# Altium PCB FEV-60_Motor_Driver_OnePhase.PcbDoc
Units mil, origin at the board's own origin, x right, y up, seen from the top; angles counter-clockwise.
Board outline 6000 x 4000 mil, 2 copper layers (Top Layer, Bottom Layer); 10 components, 11 nets, 42 pads, 7 vias.
Unrouted connection lines stored in the file: 2.
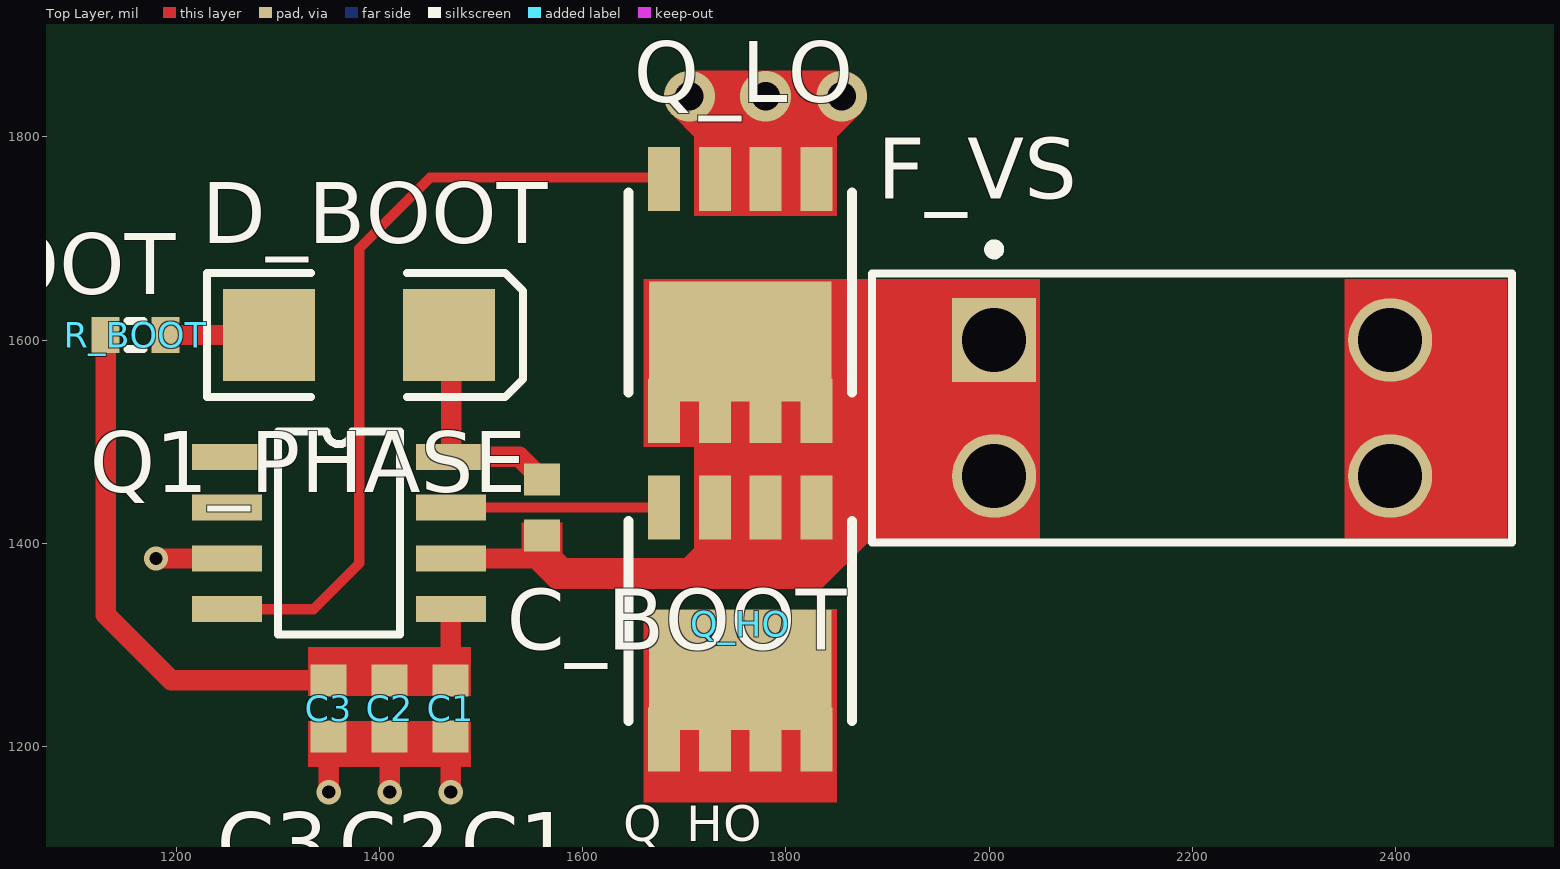
[diagram p0: Top Layer view]
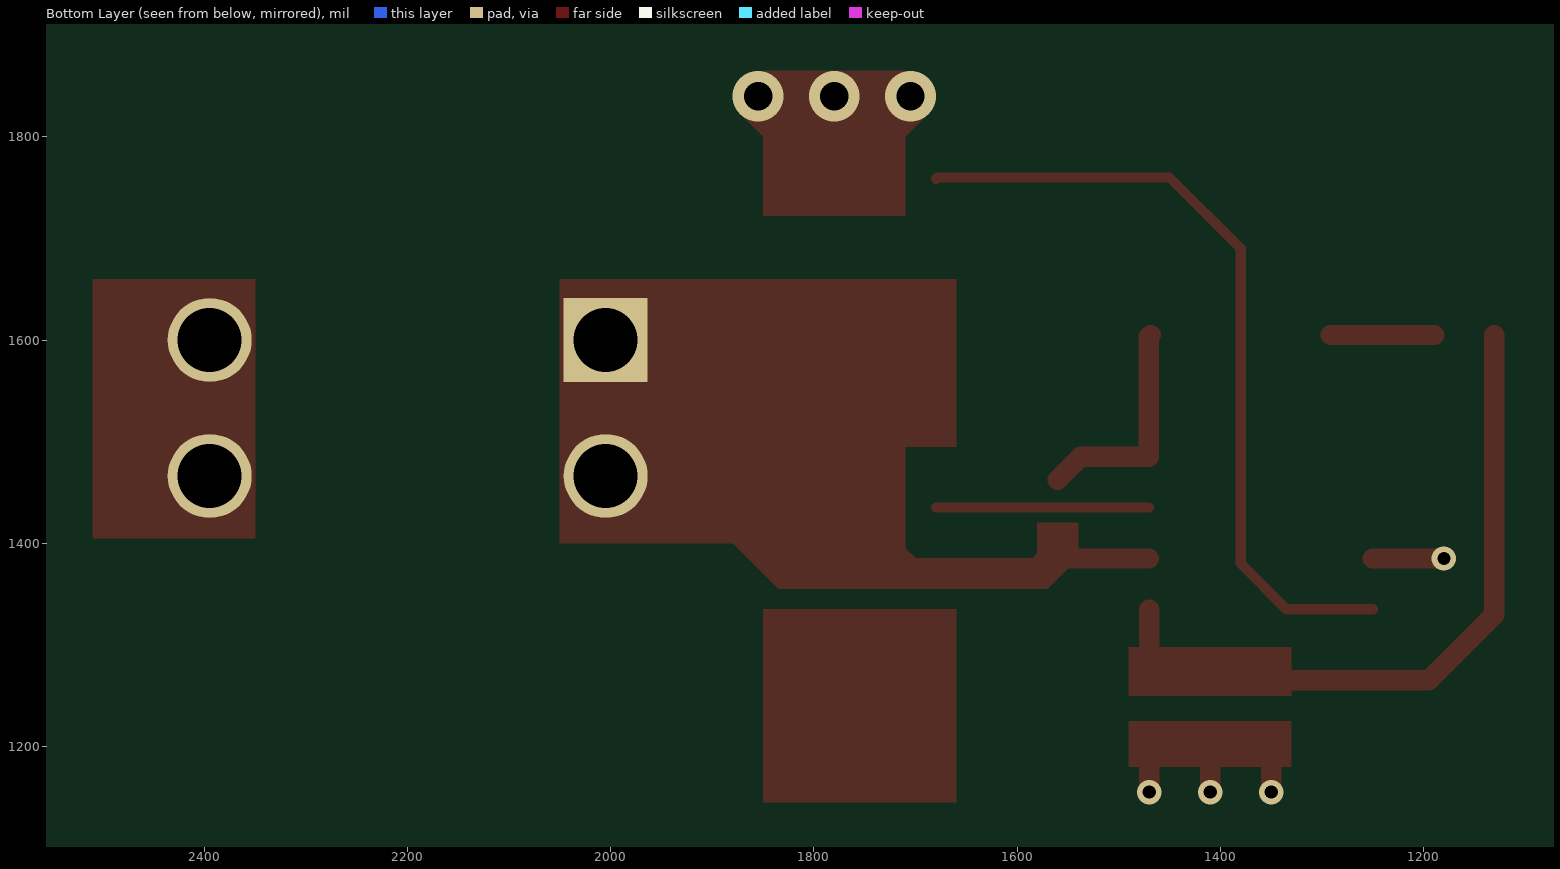
[diagram p1: Bottom Layer view, seen from below]

## Layer stack, top to bottom
Top Solder: solder mask 0.4, Solder Resist, Dk 3.5
Top Layer: signal copper 1.4
Dielectric 1: dielectric 12.6, FR-4, Dk 4.8
Bottom Layer: signal copper 1.4
Bottom Solder: solder mask 0.4, Solder Resist, Dk 3.5

## Board outline
1000,1000 7000,1000 7000,5000 1000,5000

## Design rules (kind name [scope] priority, off if disabled: settings)
Clearance [All] p1: gap=6 ignorepadtopadclearanceinfootprint=FALSE
PolygonConnect [All] p1: connectstyle=Relief reliefconductorwidth=10 reliefentries=4 polygonreliefangle="90 Angle" airgapwidth=10
RoutingVias [All] p1: holewidth=13 width=24 viastyle="Through Hole" minholewidth=13 minwidth=24 maxholewidth=28 maxwidth=50
SolderMaskExpansion [All] p1: expansion=4
Width [All] p1: maxlimit=40 minlimit=6 preferedwidth=6
30 further rules are at their usual default settings.

## Classes and differential pairs
component class FEV-60_Motor_Driver_OnePhase: C1 C2 C3 C_BOOT F_VS Q1_PHASE Q_HO Q_LO R_BOOT

## Components (designator, comment, footprint, x,y, rotation, side; value= is the part's Value field where it differs from the comment)
C1 "Cap Semi" 1608[0603] 1470,1237.44 r270 top value=10uF
C2 "Cap Semi" 1608[0603] 1410,1237.44 r270 top value=10uF
C3 "Cap Semi" 1608[0603] 1350,1237.44 r270 top value=10uF
C_BOOT "Cap Semi" 1608[0603] 1560,1435 r90 top value=270pF
D_BOOT "STPS2200U" SMB 1380,1605 r0 top
F_VS "3568" KSTN-3568_V 2199.88,1533.07 r0 top
Q1_PHASE "FAN7191-F085" SOIC8 1250,1485 r0 top
Q_HO "TPH2900ENH" TPH2900ENH 1830,1435 r270 top
Q_LO "TPH2900ENH" TPH2900ENH 1830,1758.35 r270 top
R_BOOT "Res3" J1-0603 1160,1605 r0 top value=5

## Footprints (in the part's own frame and the unit in brackets; to place one, negate y for a bottom-side part, rotate by r counter-clockwise, add the part's x,y. Pads: shape width x height; smd on the part's side, far side on the other; paste and mask are expansions set on the pad)
1608[0603] [mm] "Chip Capacitor, Body 1.6x0.8mm, IPC High Density"
  rect 0.8x0.9 smd: 1(-0.7,0) 2(0.7,0)
  body extent -0.87,-0.48 0.87,0.48, height 1.3
J1-0603 [mm] "Chip Resistor, Body 1.6x0.8mm, IPC High Density"
  rect 0.7x0.9 smd: 1(-0.75,0) 2(0.75,0)
  silkscreen extent -0.2,-0.35 0.2,0.35, body extent -0.85,-0.48 0.85,0.48, height 0.9
KSTN-3568_V [mm] "THD, 4-Leads, Body 16x6.73mm, Pitch 9.9mm"
  rect 2.1x2.1 hole 1.6: 1(-4.95,1.7)
  round 2.1 hole 1.6: 2(-4.95,-1.7) 3(4.95,1.7) 4(4.95,-1.7)
  silkscreen extent -8,-3.36 8,4.09, body extent -8,-3.37 8,3.37, height 7.44
SMB [mm] "DO-214-AA/SMB; 2 C-Bend Leads; Body 5.3 x 3.6 mm, inc. leads (LxW)"
  rect 2.3x2.3 smd: 1(-2.25,0) 2(2.25,0)
  silkscreen extent -3.8,-1.55 4.1,1.55
SOIC8 [mm]
  rect 1.75x0.65 smd: 1(0,0) 2(0,-1.27) 3(0,-2.54) 4(0,-3.81) 5(5.6,-3.81) 6(5.6,-2.54) 7(5.6,-1.27) 8(5.6,0)
  silkscreen extent 1.27,-4.44 4.32,0.64
TPH2900ENH [mm]
  rect 3x4.572 smd: 1(4.064,-1.905)
  rect 1.6x0.8 smd: 1(5.8,-1.27) 1(5.8,0) 1(5.8,-3.81) 1(5.8,-2.54) 2(0,-3.81) 3(0,0) 3(0,-1.27) 3(0,-2.54)
  silkscreen extent 0.33,-4.7 5.33,0.89

## Part data
C1 C2 C3 C_BOOT: "Capacitor (Semiconductor SIM Model)", LatestRevisionDate=29-May-2009, LatestRevisionNote="IPC-7351 Footprint Added.", PackageDescription="Chip Capacitor", PackageReference=C1206, Published=8-Jun-2000, Publisher="Altium Limited"
D_BOOT: library part "D Schottky", "Schottky Diode", Code_JEDEC=DO-214-AA, LatestRevisionDate=17-Jul-2002, LatestRevisionNote="Re-released for DXP Platform.", PackageDescription="DO-214-AA/SMB; 2 C-Bend Leads; Body 5.3 x 3.6 mm, inc. leads (LxW)", PackageReference=SMB, Published=8-Jun-2000, Publisher="Altium Limited"
F_VS: library part CMP-2000-05464-1, "Fuse Holder, 20 A, 500 V, -50 to 145 degC, 4-Pin THD, RoHS", Manufacturer=Keystone, Package Description="4-Pin Through Hole Device, Body 16 x 6.73 mm, Pitch 9.9 mm", Datasheet URL=https://datasheet.ciiva.com/16294/m60-2p40-16294706.pdf, Datasheet Version=04/2013, Manufacturer URL=http://www.keyelco.com/, Mounting Technology=ThroughHole, Package Reference=3568
Q1_PHASE: "600 V / 4.5 A, High and Low / Side Automotive Gate / Driver IC", Manufacturer="On Semiconductor", ComponentLink1Description=Datasheet, ComponentLink1URL=https://www.onsemi.com/pub/Collateral/FAN7191_F085-D.PDF, Part Number=FAN7191-F085
Q_HO Q_LO: "N-Channel 200V 33A (Ta) 78W (Tc) Surface Mount 8-SOP Advance (5x5)", Manufacturer=Toshiba, Part Number=TPH2900ENHL1QCT-ND, ComponentLink1Description=TPH2900ENH, ComponentLink1URL=https://www.digikey.com/product-detail/en/toshiba-semiconductor-and-storage/TPH2900ENHL1Q/TPH2900ENHL1QCT-ND/5456291
R_BOOT: "Resistor", LatestRevisionDate=29-May-2009, LatestRevisionNote="IPC-7351 Footprint Added.", PackageDescription="Chip Resistor", PackageReference=J1-0603, Published=8-Jun-2000, Publisher="Altium Limited"

## Via types
v1: diameter 24, hole 13, Top Layer to Bottom Layer, 4 vias
v2: diameter 50, hole 28, Top Layer to Bottom Layer, 3 vias

## Nets (pads, with @x,y where several pads share a name; then routed paths per layer and width w, separated by ;. In a path a pad name is that pad's centre, name@x,y a point inside that pad or via, vN(x,y) a via of type N, cw(c..) or ccw(c..) an arc to the next point about the centre after c; other vN are vias at no path point)
+12: C1.1 C2.1 C3.1 Q1_PHASE.5 R_BOOT.1 | length 591.9
  Top Layer w6: Q1_PHASE.5@1470,1334.53 Q1_PHASE.5
  Top Layer w20: R_BOOT.1 1130.47,1329.53 1195,1265 C3.1 ; C1.1 Q1_PHASE.5@1470,1334.53
+120: Q_HO.1
GND: C1.2 C2.2 C3.2 Q1_PHASE.3 Q_LO.3 | length 234.6
  Top Layer w20: v1(1180,1385) Q1_PHASE.3 ; v1(1350,1155) C3.2 ; v1(1410,1155) C2.2 ; v1(1470,1155) C1.2
  other v2: 1705,1840 1780,1840 1855,1840
HIN: Q1_PHASE.1
HO: Q1_PHASE.7 Q_HO.2 | length 209.5
  Top Layer w10: Q1_PHASE.7 Q_HO.2
LIN: Q1_PHASE.2
LO: Q1_PHASE.4 Q_LO.2 | length 788.3
  Top Layer w10: Q1_PHASE.4 1335,1335 1380,1380 1380,1690 1450,1760 1678.35,1760 Q_LO.2
NetD_BOOT_1: D_BOOT.1 R_BOOT.2 | length 101.9
  Top Layer w20: R_BOOT.2 D_BOOT.1
VB: C_BOOT.2 D_BOOT.2 Q1_PHASE.8 | length 219.6
  Top Layer w20: D_BOOT.2 1470.47,1603.11 Q1_PHASE.8 1537.56,1485 C_BOOT.2
VO: F_VS.3 F_VS.4
VS: C_BOOT.1 F_VS.1 F_VS.2 Q1_PHASE.6 Q_HO.3 Q_LO.1 | length 106.1
  Top Layer w6: C_BOOT.1@1560,1395 C_BOOT.1
  Top Layer w20: Q1_PHASE.6 1550,1385 C_BOOT.1@1560,1395

## Other copper
Top Layer:
  region net VS: 1540,1385 1570,1355 1835,1355 1880,1400 1710,1400 1710,1395 1700,1385 1585,1385 1580,1390 1580,1420 1540,1420
  region net GND: 1710,1800 1690,1820 1690,1845 1710,1865
  region net GND: 1710,1795
  region net GND: 1850,1800 1870,1820 1870,1845 1850,1865
  region net GND: 1710,1870
  region net VO: 2350,1660 2350,1405 2510,1405 2510,1660
  region net +120: 1850,1145 1660,1145 1660,1335 1850,1335
  region: 1660,1170
  region net GND: 1710,1865 1850,1865 1850,1722.5 1710,1722.5
  region: 1710,1795
  region net VS: 1710,1495 1660,1495 1660,1660 2050,1660 2050,1400 1710,1400
  region: 1660,1495
  region net +12: 1330,1250 1490,1250 1490,1297.5 1330,1297.5
  region net GND: 1330,1225 1490,1225 1490,1180 1330,1180